# Altium PCB launchpad_breakout.PcbDoc
Units mil, origin at the board's own origin, x right, y up, seen from the top; angles counter-clockwise.
Board outline 1915 x 3720 mil, 2 copper layers (Top Layer, Bottom Layer); 3 components, 40 nets, 80 pads, 0 vias.
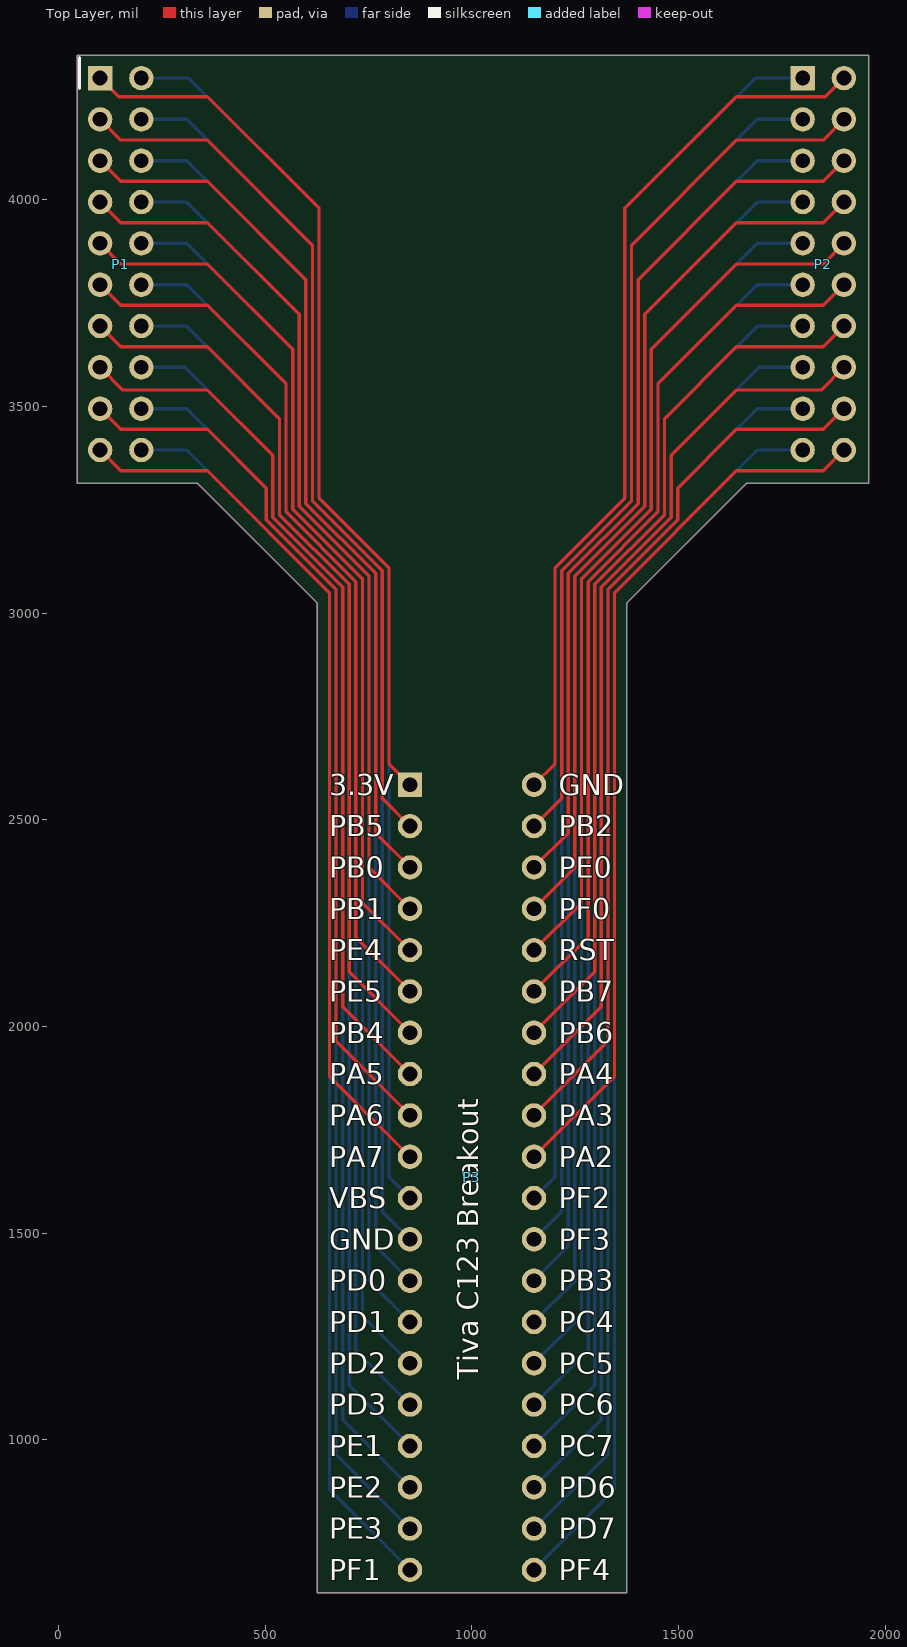
[diagram p0: Top Layer view]
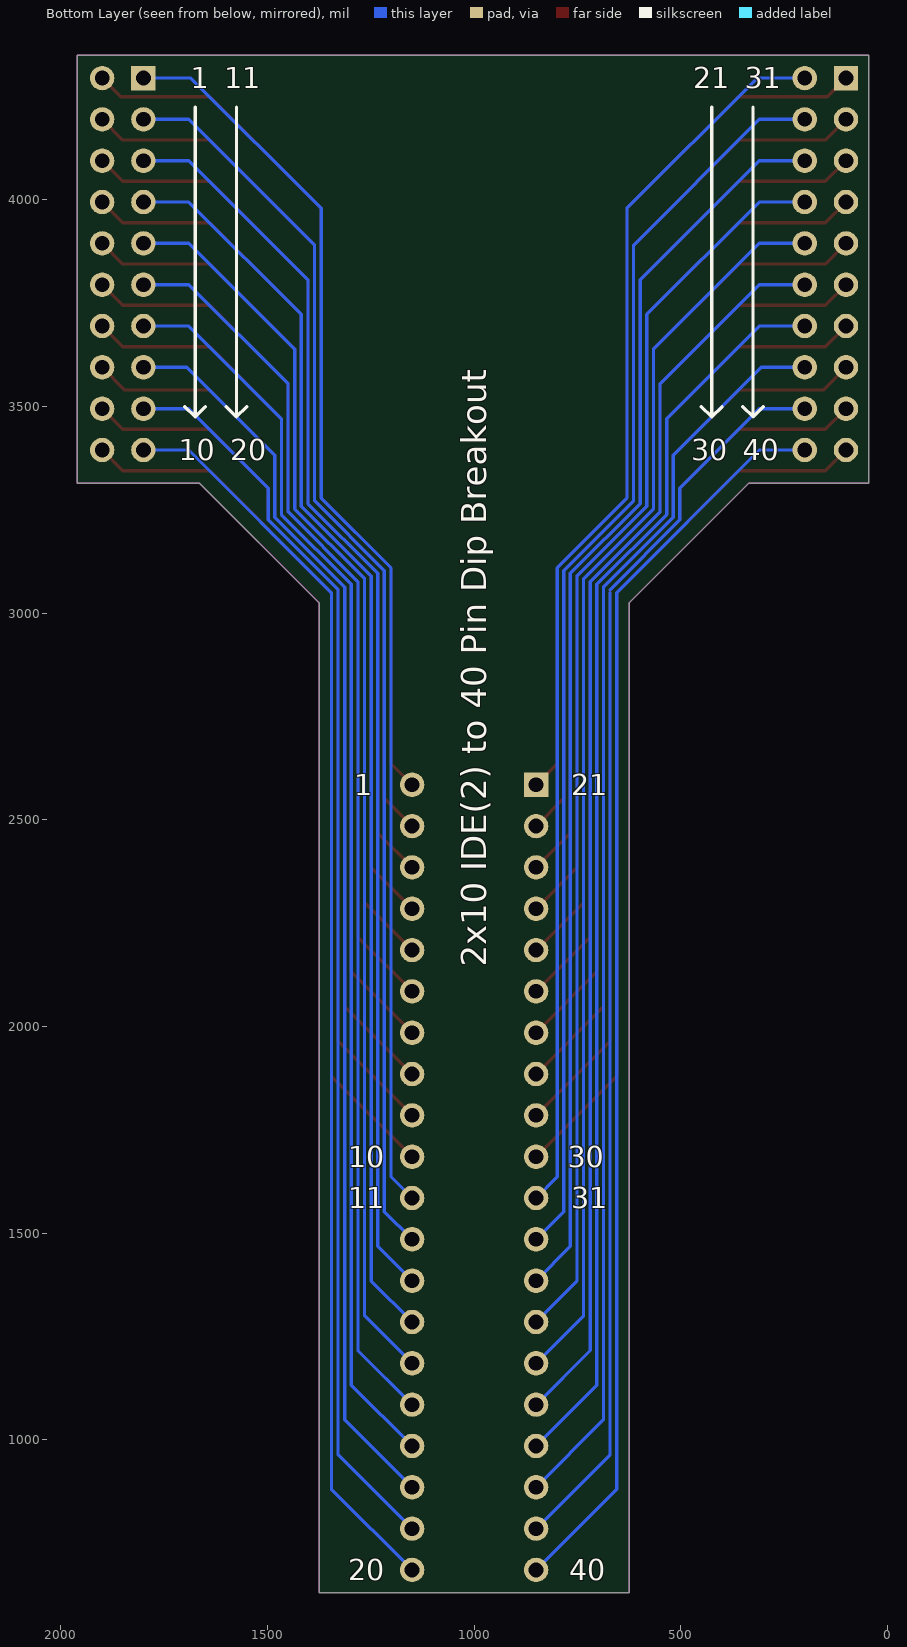
[diagram p1: Bottom Layer view, seen from below]

## Layer stack, top to bottom
Top Solder: solder mask 0.4, Solder Resist, Dk 3.5
Top Layer: signal copper 1.4
Dielectric 1: dielectric 12.6, FR-4, Dk 4.8
Bottom Layer: signal copper 1.4
Bottom Solder: solder mask 0.4, Solder Resist, Dk 3.5

## Board outline
625,880 625,630 1375,630 1375,3025 1665,3315 1960,3315 1960,4350 45,4350 45,3315 335,3315 625,3025

## Design rules (kind name [scope] priority, off if disabled: settings)
Clearance [All] p1: gap=8
PlaneConnect [All] p1: planeconnectstyle=Relief reliefexpansion=8 reliefentries=4 reliefconductorwidth=8 reliefairgap=8
PolygonConnect [All] p1: connectstyle=Relief reliefconductorwidth=10 reliefentries=4 polygonreliefangle="90 Angle" airgapwidth=10
RoutingVias [All] p1: holewidth=28 width=50 viastyle="Through Hole" minholewidth=28 minwidth=50 maxholewidth=28 maxwidth=50
SolderMaskExpansion [All] p1: expansion=4
Width [All] p1: maxlimit=8 minlimit=8 preferedwidth=8
29 further rules are at their usual default settings.

## Components (designator, comment, footprint, x,y, rotation, side; value= is the part's Value field where it differs from the comment)
P1 "Header 10X2" HDR2X10 100,4295 r270 top
P2 "Header 10X2" HDR2X10 1800,4295 r270 top
P3 "Header 20X2" 2x20wide 1000,1635 r0 top

## Footprints (in the part's own frame and the unit in brackets; to place one, negate y for a bottom-side part, rotate by r counter-clockwise, add the part's x,y. Pads: shape width x height; smd on the part's side, far side on the other; paste and mask are expansions set on the pad)
2x20wide [mm]
  rect 1.5x1.5 hole 0.9: 1(-3.81,24.13)
  round 1.5 hole 0.9: 2(3.81,24.13) 3(-3.81,21.59) 4(3.81,21.59) 5(-3.81,19.05) 6(3.81,19.05) 7(-3.81,16.51) 8(3.81,16.51) 9(-3.81,13.97) 10(3.81,13.97) 11(-3.81,11.43) 12(3.81,11.43) 13(-3.81,8.89) 14(3.81,8.89) 15(-3.81,6.35) 16(3.81,6.35) 17(-3.81,3.81) 18(3.81,3.81) 19(-3.81,1.27) 20(3.81,1.27) 21(-3.81,-1.27) 22(3.81,-1.27) 23(-3.81,-3.81) 24(3.81,-3.81) 25(-3.81,-6.35) 26(3.81,-6.35) 27(-3.81,-8.89) 28(3.81,-8.89) 29(-3.81,-11.43) 30(3.81,-11.43) 31(-3.81,-13.97) 32(3.81,-13.97) 33(-3.81,-16.51) 34(3.81,-16.51) 35(-3.81,-19.05) 36(3.81,-19.05) 37(-3.81,-21.59) 38(3.81,-21.59) 39(-3.81,-24.13) 40(3.81,-24.13)
HDR2X10 [mm] "Connector; Header; 10x2 Position"
  rect 1.5x1.5 hole 0.9: 1(0,0)
  round 1.5 hole 0.9: 2(0,2.54) 3(2.54,0) 4(2.54,2.54) 5(5.08,0) 6(5.08,2.54) 7(7.62,0) 8(7.62,2.54) 9(10.16,0) 10(10.16,2.54) 11(12.7,0) 12(12.7,2.54) 13(15.24,0) 14(15.24,2.54) 15(17.78,0) 16(17.78,2.54) 17(20.32,0) 18(20.32,2.54) 19(22.86,0) 20(22.86,2.54)
  silkscreen extent -1.27,-1.27 0.63,-1.27

## Part data
P1 P2: "Header, 10-Pin, Dual row"
P3: "Header, 20-Pin, Dual row"

## Nets (pads, with @x,y where several pads share a name; then routed paths per layer and width w, separated by ;. In a path a pad name is that pad's centre, name@x,y a point inside that pad or via, vN(x,y) a via of type N, cw(c..) or ccw(c..) an arc to the next point about the centre after c; other vN are vias at no path point)
NetP1_1: P1.1 P3.1 | length 2146.6
  Top Layer w8: P1.1 145,4250 360,4250 630,3980 630,3278.65 799,3109.65 799,2636 P3.1
NetP1_2: P1.2 P3.21 | length 3046.6
  Bottom Layer w8: P1.2 315,4295 630,3980 630,3278.65 799,3109.65 799,1636 P3.21
NetP1_3: P1.3 P3.3 | length 2143.7
  Top Layer w8: P1.3 150,4145 360,4145 614,3891 614,3272.02 783,3103.02 783,2552 P3.3
NetP1_4: P1.4 P3.23 | length 3043.7
  Bottom Layer w8: P1.4 310,4195 614,3891 614,3272.02 783,3103.02 783,1552 P3.23
NetP1_5: P1.5 P3.5 | length 2143.7
  Top Layer w8: P1.5 150,4045 360,4045 598,3807 598,3265.39 767,3096.39 767,2468 P3.5
NetP1_6: P1.6 P3.25 | length 3043.7
  Bottom Layer w8: P1.6 310,4095 598,3807 598,3265.39 767,3096.39 767,1468 P3.25
NetP1_7: P1.7 P3.7 | length 2143.7
  Top Layer w8: P1.7 150,3945 360,3945 582,3723 582,3258.76 751,3089.76 751,2384 P3.7
NetP1_8: P1.8 P3.27 | length 3043.7
  Bottom Layer w8: P1.8 310,3995 582,3723 582,3258.76 751,3089.76 751,1384 P3.27
NetP1_9: P1.9 P3.9 | length 2143.7
  Top Layer w8: P1.9 150,3845 360,3845 566,3639 566,3252.14 735,3083.14 735,2300 P3.9
NetP1_10: P1.10 P3.29 | length 3043.7
  Bottom Layer w8: P1.10 310,3895 566,3639 566,3252.14 735,3083.14 735,1300 P3.29
NetP1_11: P1.11 P3.11 | length 2143.7
  Top Layer w8: P1.11 150,3745 360,3745 550,3555 550,3245.51 719,3076.51 719,2216 P3.11
NetP1_12: P1.12 P3.31 | length 3043.7
  Bottom Layer w8: P1.12 310,3795 550,3555 550,3245.51 719,3076.51 719,1216 P3.31
NetP1_13: P1.13 P3.13 | length 2143.7
  Top Layer w8: P1.13 150,3645 360,3645 534,3471 534,3238.88 703,3069.88 703,2132 P3.13
NetP1_14: P1.14 P3.33 | length 3043.7
  Bottom Layer w8: P1.14 310,3695 534,3471 534,3238.88 703,3069.88 703,1132 P3.33
NetP1_15: P1.15 P3.15 | length 2140.7
  Top Layer w8: P1.15 155,3540 360,3540 518,3382 518,3232.25 687,3063.25 687,2048 P3.15
NetP1_16: P1.16 P3.35 | length 3040.7
  Bottom Layer w8: P1.16 305,3595 518,3382 518,3232.25 687,3063.25 687,1048 P3.35
NetP1_17: P1.17 P3.17 | length 2143.7
  Top Layer w8: P1.17 150,3445 360,3445 502,3303 502,3225.63 671,3056.63 671,1964 P3.17
NetP1_18: P1.18 P3.37 | length 3037
  Bottom Layer w8: P1.18 310,3495 502,3303 502,3225.63 671,3056.63 ; 671,3050 671,964 P3.37
NetP1_19: P1.19 P3.19 | length 2143.7
  Top Layer w8: P1.19 150,3345 360,3345 655,3050 655,1880 P3.19
NetP1_20: P1.20 P3.39 | length 3043.7
  Bottom Layer w8: P1.20 310,3395 655,3050 655,880 P3.39
NetP2_1: P2.1 P3.22 | length 3046.6
  Bottom Layer w8: P3.22 1201,1636 1201,3109.65 1370,3278.65 1370,3980 1685,4295 P2.1
NetP2_2: P2.2 P3.2 | length 2146.6
  Top Layer w8: P3.2 1201,2636 1201,3109.65 1370,3278.65 1370,3980 1640,4250 1855,4250 P2.2
NetP2_3: P2.3 P3.24 | length 3043.7
  Bottom Layer w8: P3.24 1217,1552 1217,3103.02 1386,3272.02 1386,3891 1690,4195 P2.3
NetP2_4: P2.4 P3.4 | length 2143.7
  Top Layer w8: P3.4 1217,2552 1217,3103.02 1386,3272.02 1386,3891 1640,4145 1850,4145 P2.4
NetP2_5: P2.5 P3.26 | length 3043.7
  Bottom Layer w8: P3.26 1233,1468 1233,3096.39 1402,3265.39 1402,3807 1690,4095 P2.5
NetP2_6: P2.6 P3.6 | length 2143.7
  Top Layer w8: P3.6 1233,2468 1233,3096.39 1402,3265.39 1402,3807 1640,4045 1850,4045 P2.6
NetP2_7: P2.7 P3.28 | length 3043.7
  Bottom Layer w8: P3.28 1249,1384 1249,3089.76 1418,3258.76 1418,3723 1690,3995 P2.7
NetP2_8: P2.8 P3.8 | length 2143.7
  Top Layer w8: P3.8 1249,2384 1249,3089.76 1418,3258.76 1418,3723 1640,3945 1850,3945 P2.8
NetP2_9: P2.9 P3.30 | length 3043.7
  Bottom Layer w8: P3.30 1265,1300 1265,3083.14 1434,3252.14 1434,3639 1690,3895 P2.9
NetP2_10: P2.10 P3.10 | length 2143.7
  Top Layer w8: P3.10 1265,2300 1265,3083.14 1434,3252.14 1434,3639 1640,3845 1850,3845 P2.10
NetP2_11: P2.11 P3.32 | length 3043.7
  Bottom Layer w8: P3.32 1281,1216 1281,3076.51 1450,3245.51 1450,3555 1690,3795 P2.11
NetP2_12: P2.12 P3.12 | length 2143.7
  Top Layer w8: P3.12 1281,2216 1281,3076.51 1450,3245.51 1450,3555 1640,3745 1850,3745 P2.12
NetP2_13: P2.13 P3.34 | length 3043.7
  Bottom Layer w8: P3.34 1297,1132 1297,3069.88 1466,3238.88 1466,3471 1690,3695 P2.13
NetP2_14: P2.14 P3.14 | length 2143.7
  Top Layer w8: P3.14 1297,2132 1297,3069.88 1466,3238.88 1466,3471 1640,3645 1850,3645 P2.14
NetP2_15: P2.15 P3.36 | length 3040.7
  Bottom Layer w8: P3.36 1313,1048 1313,3063.25 1482,3232.25 1482,3382 1695,3595 P2.15
NetP2_16: P2.16 P3.16 | length 2140.7
  Top Layer w8: P3.16 1313,2048 1313,3063.25 1482,3232.25 1482,3382 1640,3540 1845,3540 P2.16
NetP2_17: P2.17 P3.38 | length 3043.7
  Bottom Layer w8: P3.38 1329,964 1329,3056.63 1498,3225.63 1498,3303 1690,3495 P2.17
NetP2_18: P2.18 P3.18 | length 2143.7
  Top Layer w8: P3.18 1329,1964 1329,3056.63 1498,3225.63 1498,3303 1640,3445 1850,3445 P2.18
NetP2_19: P2.19 P3.40 | length 3043.7
  Bottom Layer w8: P3.40 1345,880 1345,3050 1690,3395 P2.19
NetP2_20: P2.20 P3.20 | length 2143.7
  Top Layer w8: P3.20 1345,1880 1345,3050 1640,3345 1850,3345 P2.20

## Keep-outs
Keep-Out Layer:
  lines w0: 45,3315 335,3315 625,3025 625,630 1375,630 1375,3025 1665,3315 1960,3315 1960,4350 45,4350 45,3315

## Silkscreen, mask and mechanical layers (free items; w line width, h text height)
Top Overlay:
  text "3.3V" at 655,2560 h50
  text "GND" at 1210,2560 h50
  text "PB5" at 655,2460 h50
  text "PB2" at 1210,2460 h50
  text "PB0" at 655,2360 h50
  text "PE0" at 1210,2360 h50
  text "PB1" at 655,2260 h50
  text "PF0" at 1210,2260 h50
  text "PE4" at 655,2160 h50
  text "RST" at 1210,2160 h50
  text "PE5" at 655,2060 h50
  text "PB7" at 1210,2060 h50
  text "PB4" at 655,1960 h50
  text "PB6" at 1210,1960 h50
  text "PA5" at 655,1860 h50
  text "PA4" at 1210,1860 h50
  text "PA6" at 655,1760 h50
  text "PA3" at 1210,1760 h50
  text "PA7" at 655,1660 h50
  text "PA2" at 1210,1660 h50
  text "VBS" at 655,1560 h50
  text "PF2" at 1210,1560 h50
  text "GND" at 655,1460 h50
  text "PF3" at 1210,1460 h50
  text "PD0" at 655,1360 h50
  text "PB3" at 1210,1360 h50
  text "PD1" at 655,1260 h50
  text "PC4" at 1210,1260 h50
  text "PD2" at 655,1160 h50
  text "PC5" at 1210,1160 h50
  text "Tiva C123 Breakout" at 1015,1145 h50 r90
  text "PD3" at 655,1060 h50
  text "PC6" at 1210,1060 h50
  text "PE1" at 655,960 h50
  text "PC7" at 1210,960 h50
  text "PE2" at 655,860 h50
  text "PD6" at 1210,860 h50
  text "PE3" at 655,760 h50
  text "PD7" at 1210,760 h50
  text "PF1" at 655,660 h50
  text "PF4" at 1210,660 h50
Bottom Overlay:
  lines w8: 300,3500 325,3475 ; 325,4225 325,3475 ; 350,3500 325,3475 ; 400,3500 425,3475 ; 425,4225 425,3475 ; 450,3500 425,3475 ; 1550,3500 1575,3475 ; 1575,4225 1575,3475 ; 1600,3500 1575,3475 ; 1650,3500 1675,3475 ; 1675,4225 1675,3475 ; 1700,3500 1675,3475
  text "31" at 345,4270 h50
  text "21" at 470,4270 h50
  text "11" at 1605,4270 h50
  text "1" at 1685,4270 h50
  text "40" at 350,3370 h50
  text "30" at 475,3370 h50
  text "20" at 1590,3370 h50
  text "10" at 1715,3370 h50
  text "21" at 765,2560 h50
  text "1" at 1290,2560 h50
  text "2x10 IDE(2) to 40 Pin Dip Breakout" at 970,2145 h60 r270
  text "30" at 773.33,1660 h50
  text "10" at 1305,1660 h50
  text "31" at 765,1560 h50
  text "11" at 1305,1560 h50
  text "40" at 770,660 h50
  text "20" at 1305,660 h50